# Altium PCB 64_Electrodes.PcbDoc
Units mil, origin at the board's own origin, x right, y up, seen from the top; angles counter-clockwise.
Board outline 2035.03 x 1255.03 mil, 2 copper layers (Top Layer, Bottom Layer); 4 components, 0 nets, 140 pads, 32 vias.
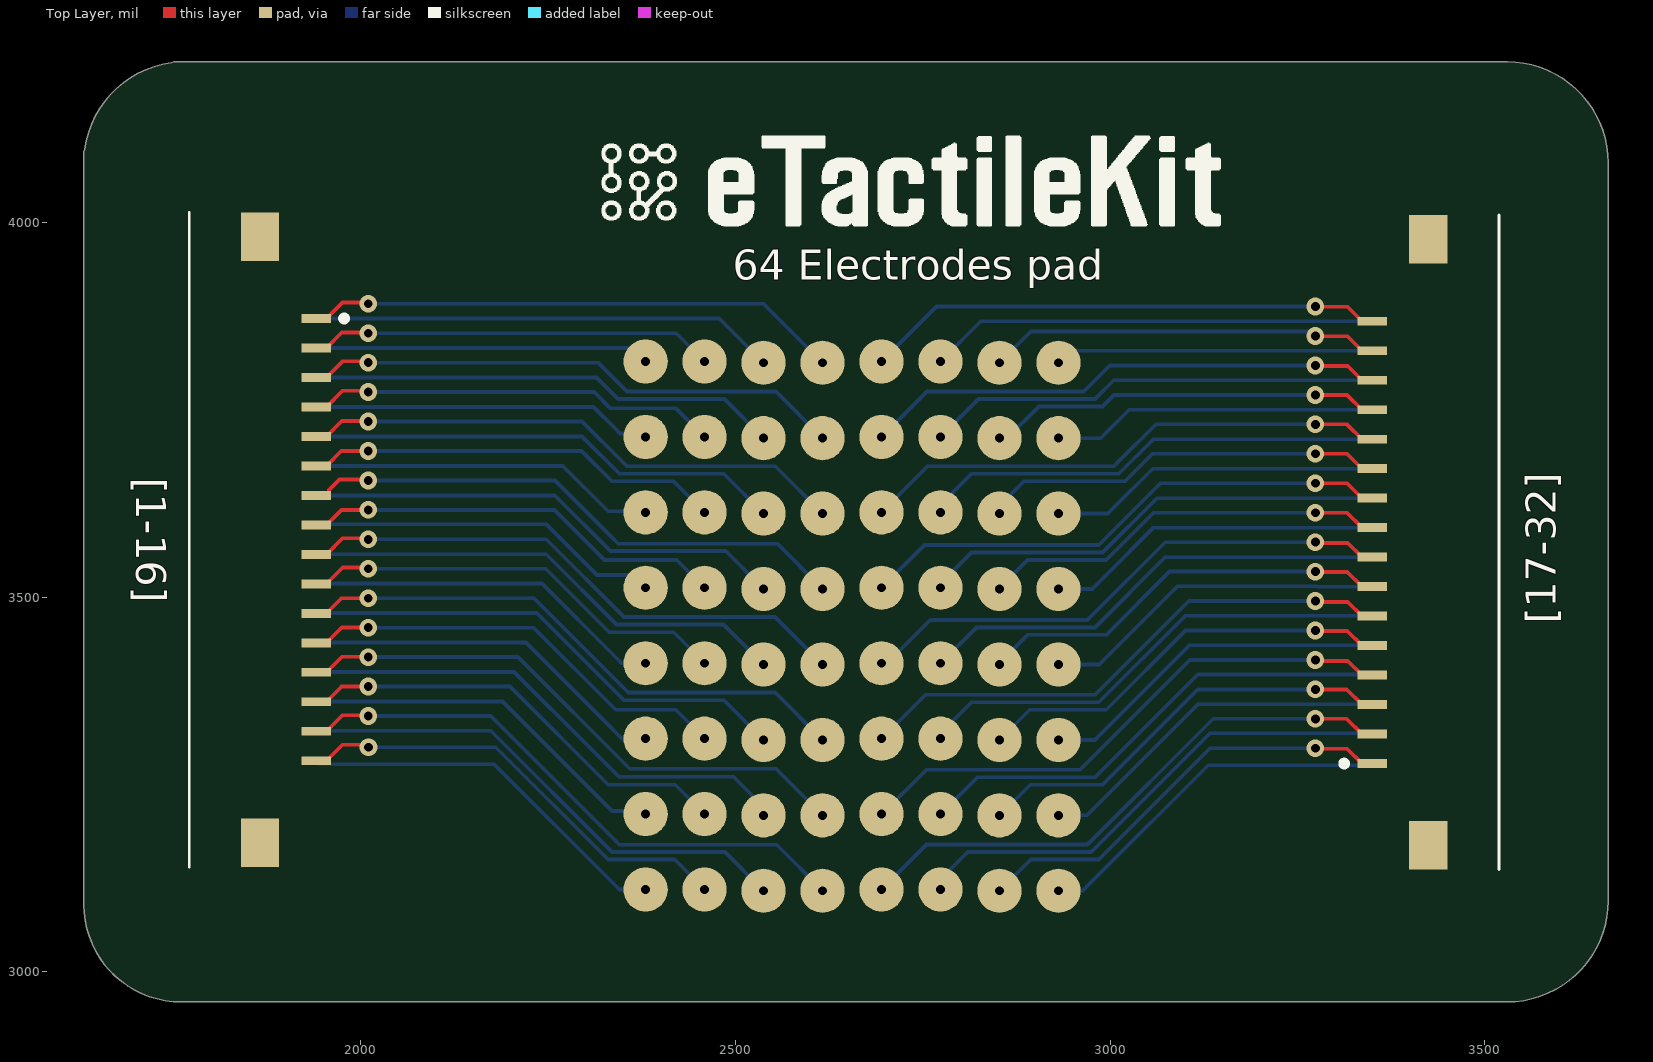
[diagram p0: Top Layer view]
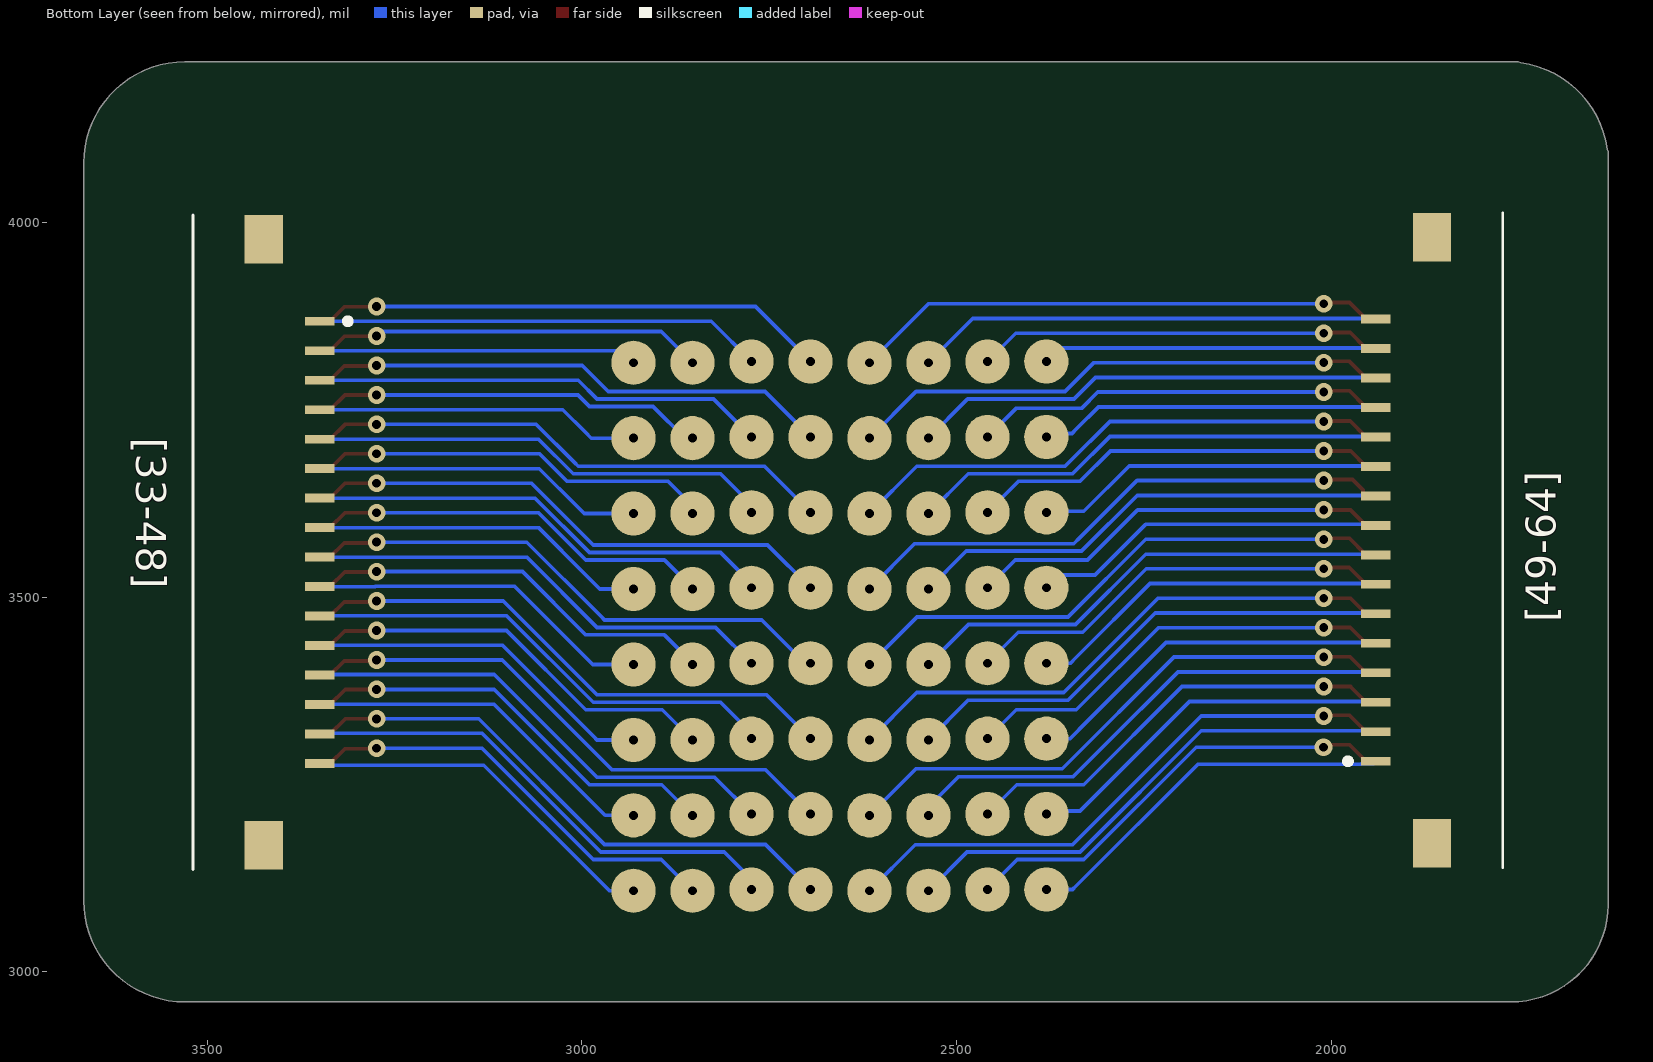
[diagram p1: Bottom Layer view, seen from below]

## Layer stack, top to bottom
Top Solder: solder mask 0.4, Solder Resist, Dk 3.5
Top Layer: signal copper 1.4
Dielectric 1: dielectric 12.6, FR-4, Dk 4.8
Bottom Layer: signal copper 1.4
Bottom Solder: solder mask 0.4, Solder Resist, Dk 3.5

## Board outline
1629.98,3090 1629.98,4095 1631.23,4098.31 cw(c1765,4080) 1746.69,4213.77 1750,4215.02 3530,4215.02 cw(c3530,4080) 3665.01,4080 3665.01,3095 cw(c3530,3095) 3530,2959.99 1760,2959.99 cw(c1760,3090)

## Design rules (kind name [scope] priority, off if disabled: settings)
BoardOutlineClearance [All] p1: gap=7.87 ignorepadtopadclearanceinfootprint=FALSE
Clearance [All] p1: gap=5 ignorepadtopadclearanceinfootprint=FALSE except(9.84: Arc-Hole Track-Hole SMDPad-Hole THPad-Hole Via-Hole Fill-Hole Poly-Hole Region-Hole Text-Hole)
ComponentClearance [All] p1: gap=5 collisioncheckmode=3 verticalgap=5 showdistances=TRUE
DiffPairsRouting [All] p1: maxlimit=10 minlimit=5 mostfreqgap=5 toplayer_minwidth=5 toplayer_maxwidth=1000 toplayer_prefwidth=5 bottomlayer_minwidth=5 bottomlayer_maxwidth=1000 bottomlayer_prefwidth=5 maxuncoupledlength=500
Height [All] p1: minheight=0 maxheight=71497.94 prefheight=500
HoleSize [All] p1: absolutevalues=TRUE maxlimit=248.03 minlimit=11.81 maxpercent=80.000 minpercent=20.000
HoleToHoleClearance [All] p1: gap=9.84 allowstackedmicrovias=FALSE
MinimumAnnularRing [All] p1: minimumring=3
MinimumSolderMaskSliver [All] p1: minsoldermaskwidth=0
PlaneClearance [All] p1: clearance=5
PlaneConnect PlaneConnectPowerPads [InPadClass('PowerPads')] p1: planeconnectstyle=Direct reliefexpansion=20 reliefentries=4 reliefconductorwidth=10 reliefairgap=10
PlaneConnect [All] p2: pad.planeconnectstyle=Relief pad.reliefexpansion=11.81 pad.reliefentries=4 pad.reliefconductorwidth=5 pad.reliefairgap=5 via.planeconnectstyle=Direct via.reliefexpansion=11.81 via.reliefentries=4 via.reliefconductorwidth=5 via.reliefairgap=5
PolygonConnect PolygonConnectPowerPads [All vs (InPadClass('PowerPads'))] p1: connectstyle=Direct reliefconductorwidth=10 reliefentries=4 polygonreliefangle="90 Angle" airgapwidth=10
PolygonConnect [All] p2: thpad.connectstyle=Relief thpad.reliefconductorwidth=5 thpad.reliefentries=4 thpad.polygonreliefangle="90 Angle" thpad.airgapwidth=5 smdpad.connectstyle=Relief smdpad.reliefconductorwidth=5 smdpad.reliefentries=4 smdpad.polygonreliefangle="90 Angle" smdpad.airgapwidth=5 via.connectstyle=Direct via.reliefconductorwidth=5 via.reliefentries=4 via.polygonreliefangle="90 Angle" via.airgapwidth=5
RoutingVias [All] p1: holewidth=11.81 width=23.62 viastyle="Through Hole" minholewidth=11.81 minwidth=23.62 maxholewidth=23.62 maxwidth=259.84
SilkToSilkClearance [All] p1: silktosilkclearance=0
SilkToSolderMaskClearance [IsPad] p1: minsilkscreentomaskgap=5 clearancetoexposedcopper=TRUE
SolderMaskExpansion [All] p1: expansion=2.95 istentingtop=FALSE
Width [All] p1: maxlimit=1000 minlimit=5 preferedwidth=5 minimp=50.000000 maximp=50.000000 favimp=50.000000
20 further rules are at their usual default settings.

## Classes and differential pairs
component class Sheet10: [17-32] [33-48] [49-64]

## Components (designator, comment, footprint, x,y, rotation, side; value= is the part's Value field where it differs from the comment)
[1-16] "686116183422" 686116183422 1855.35,3577.17 r270 top (schematic designator P2)
[17-32] "686116183422" 686116183422 3434.65,3573.46 r90 top (schematic designator P4)
[33-48] "686116183422" 686116183422 3434.65,3573.46 r270 bottom (schematic designator P1)
[49-64] "686116183422" 686116183422 1855.35,3576.54 r90 bottom (schematic designator P3)

## Footprints (in the part's own frame and the unit in brackets; to place one, negate y for a bottom-side part, rotate by r counter-clockwise, add the part's x,y. Pads: shape width x height; smd on the part's side, far side on the other; paste and mask are expansions set on the pad)
686116183422 [mm]
  rect 0.3x1 smd: 1(-7.5,2.15) 2(-6.5,2.15) 3(-5.5,2.15) 4(-4.5,2.15) 5(-3.5,2.15) 6(-2.5,2.15) 7(-1.5,2.15) 8(-0.5,2.15) 9(0.5,2.15) 10(1.5,2.15) 11(2.5,2.15) 12(3.5,2.15) 13(4.5,2.15) 14(5.5,2.15) 15(6.5,2.15) 16(7.5,2.15)
  rect 1.65x1.3 smd: MP1(10.275,0.25) MP2(-10.275,0.25)
  silkscreen extent -11.1,-2.15 11.1,3.2, body extent -11.1,-2.15 11.1,2.62, height 1.4

## Part data
[1-16] [17-32] [33-48] [49-64]: "Wurth Elektronik WR-FPC Series 1mm Pitch 16 Way Horizontal SMT Female FPC Connector, Top Contact", Manufacturer_Name="Wurth Elektronik", Mouser Part Number=710-686116183422, Datasheet Link=https://componentsearchengine.com/Datasheets/1/686116183422.pdf, Geometry.Height=1.3mm, Manufacturer_Part_Number=686116183422, Mouser Price/Stock=https://www.mouser.co.uk/ProductDetail/Wurth-Elektronik/686116183422?qs=5aG0NVq1C4zMCTkNAYvBmg%3D%3D

## Free pads (board coordinates)
  round 59.06 hole 11.81: 308(2380,3815) 308(2537.48,3813.35) 308(2695,3815) 308(2852.48,3813.35) 309(2380,3110) 309(2537.48,3108.35) 309(2695,3110) 309(2852.48,3108.35) 310(2380,3714.29) 310(2537.48,3712.63) 310(2695,3714.29) 310(2852.48,3712.63) 311(2380,3512.86) 311(2537.48,3511.2) 311(2695,3512.86) 311(2852.48,3511.2) 312(2380,3311.43) 312(2537.48,3309.77) 312(2695,3311.43) 312(2852.48,3309.77) 313(2380,3210.71) 313(2537.48,3209.06) 313(2695,3210.71) 313(2852.48,3209.06) 314(2380,3613.57) 314(2537.48,3611.92) 314(2695,3613.57) 314(2852.48,3611.92) 315(2380,3412.14) 315(2537.48,3410.49) 315(2695,3412.14) 315(2852.48,3410.49) 316(2458.74,3815) 316(2616.22,3813.35) 316(2773.74,3815) 316(2931.22,3813.35) 317(2458.74,3512.86) 317(2458.74,3613.57) 317(2616.22,3511.2) 317(2616.22,3611.92) 317(2773.74,3512.86) 317(2773.74,3613.57) 317(2931.22,3511.2) 317(2931.22,3611.92) 318(2458.74,3311.43) 318(2616.22,3309.77) 318(2773.74,3311.43) 318(2931.22,3309.77) 319(2458.74,3210.71) 319(2616.22,3209.06) 319(2773.74,3210.71) 319(2931.22,3209.06) 320(2458.74,3110) 320(2616.22,3108.35) 320(2773.74,3110) 320(2931.22,3108.35) 321(2458.74,3714.29) 321(2616.22,3712.63) 321(2773.74,3714.29) 321(2931.22,3712.63) 322(2458.74,3412.14) 322(2616.22,3410.49) 322(2773.74,3412.14) 322(2931.22,3410.49) 323(2458.74,3311.43) 323(2616.22,3309.77) 323(2773.74,3311.43) 323(2931.22,3309.77)

## Via types
v1: diameter 23.62, hole 11.81, Top Layer to Bottom Layer, 32 vias

## Nets (pads, with @x,y where several pads share a name; then routed paths per layer and width w, separated by ;. In a path a pad name is that pad's centre, name@x,y a point inside that pad or via, vN(x,y) a via of type N, cw(c..) or ccw(c..) an arc to the next point about the centre after c; other vN are vias at no path point)
pads on no net: [1-16].1 [1-16].2 [1-16].3 [1-16].4 [1-16].5 [1-16].6 [1-16].7 [1-16].8 [1-16].9 [1-16].10 [1-16].11 [1-16].12 [1-16].13 [1-16].14 [1-16].15 [1-16].16 [1-16].MP1 [1-16].MP2 [17-32].1 [17-32].2 [17-32].3 [17-32].4 [17-32].5 [17-32].6 [17-32].7 [17-32].8 [17-32].9 [17-32].10 [17-32].11 [17-32].12 [17-32].13 [17-32].14 [17-32].15 [17-32].16 [17-32].MP1 [17-32].MP2 [33-48].1 [33-48].2 [33-48].3 [33-48].4 [33-48].5 [33-48].6 [33-48].7 [33-48].8 [33-48].9 [33-48].10 [33-48].11 [33-48].12 [33-48].13 [33-48].14 [33-48].15 [33-48].16 [33-48].MP1 [33-48].MP2 [49-64].1 [49-64].2 [49-64].3 [49-64].4 [49-64].5 [49-64].6 [49-64].7 [49-64].8 [49-64].9 [49-64].10 [49-64].11 [49-64].12 [49-64].13 [49-64].14 [49-64].15 [49-64].16 [49-64].MP1 [49-64].MP2
copper on no net: | length 38667.3
  Top Layer w5: 1940,3281.89 1953.78,3281.89 1975.23,3303.34 1988.19,3303.34 2006.66,3303.34 v1(2010,3300) ; 1940,3321.26 1953.78,3321.26 1975.23,3342.71 2008.67,3342.71 v1(2009.71,3341.67) ; 1940,3400 1953.78,3400 1974.65,3420.87 1980.87,3420.87 v1@2009.14,3420.87 ; 1940,3439.37 1953.78,3439.37 1974.41,3460 1980,3460 2009.32,3460 v1(2009.71,3459.61) v1@2008.5,3460.82 ; 1940,3478.74 1953.78,3478.74 1957.19,3482.15 ; 1940,3518.11 1953.78,3518.11 1975.67,3540 1985,3540 2007.95,3540 2008.39,3539.56 v1(2009.71,3538.24) ; 1940,3557.48 1953.78,3557.48 1975.23,3578.93 2008.33,3578.93 v1(2009.71,3577.55) ; 1940,3596.85 1953.78,3596.85 1973.79,3616.86 v1(2009.71,3616.86) v1@2008.28,3618.3 ; 1940,3636.22 1953.78,3636.22 1957.19,3639.63 1957.19,3643.32 1971.26,3657.4 2008.49,3657.4 v1(2009.71,3656.18) ; 1940,3675.59 1953.78,3675.59 1973.68,3695.49 v1(2009.71,3695.49) ; 1940,3714.96 1953.78,3714.96 1974.42,3735.61 v1@2008.91,3735.61 ; 1940,3754.33 1953.78,3754.33 1975.23,3775.78 2008.05,3775.78 v1(2009.71,3774.12) ; 1940,3793.7 1953.78,3793.7 1975.23,3815.15 2008,3815.15 v1(2009.71,3813.43) ; 1940,3833.07 1953.78,3833.07 1974.34,3853.63 1983.63,3853.63 v1@2008.83,3853.63 ; 1940,3872.44 1953.78,3872.44 1975.23,3893.89 2007.88,3893.89 v1(2009.71,3892.06) ; 1941.1,3359.53 1940,3360.63 1953.78,3360.63 1973.15,3380 1974.13,3380.98 v1(2009.71,3380.98) ; 1957.19,3482.19 1973.92,3498.92 v1(2009.71,3498.92) ; v1@2007.94,3854.52 v1(2009.71,3852.75) ; v1@2008.11,3736.41 v1(2009.71,3734.8) ; v1@2008.56,3421.45 v1(2009.71,3420.29) ; v1(3274.15,3298.58) v1@3275.57,3297.16 ; v1(3274.15,3416.52) 3275.4,3415.27 3317.25,3415.27 3336.22,3396.3 3350,3396.3 ; v1(3274.15,3455.83) v1@3275.35,3454.64 ; v1(3274.15,3495.15) 3275.29,3494.01 3317.25,3494.01 3336.22,3475.04 3350,3475.04 ; v1(3274.15,3534.46) v1@3275.23,3533.38 ; v1(3274.15,3573.78) 3275.18,3572.75 3317.25,3572.75 3336.22,3553.78 3350,3553.78 ; v1(3274.15,3809.66) 3274.84,3808.97 3317.25,3808.97 3336.22,3790 3350,3790 ; v1(3274.15,3848.97) v1@3274.78,3848.34 ; v1(3274.15,3888.29) v1@3274.73,3887.71 ; v1@3274.47,3848.66 3316.93,3848.66 3336.22,3829.37 3350,3829.37 ; v1@3274.44,3888 3316.96,3888 3336.22,3868.74 3350,3868.74 ; v1@3274.69,3533.92 3316.71,3533.92 3336.22,3514.41 3350,3514.41 ; v1@3274.75,3455.24 3316.65,3455.24 3336.22,3435.67 3350,3435.67 ; v1@3274.86,3297.87 3316.54,3297.87 3336.22,3278.19 3350,3278.19 ; v1@3274.9,3769.6 v1(3274.15,3770.34) 3316.51,3770.34 3336.22,3750.63 3350,3750.63 ; v1@3274.95,3730.23 v1(3274.15,3731.03) 3316.45,3731.03 3336.22,3711.26 3350,3711.26 ; v1@3275.01,3690.86 v1(3274.15,3691.72) 3316.39,3691.72 3336.22,3671.89 3350,3671.89 ; v1@3275.07,3651.49 v1(3274.15,3652.4) 3316.34,3652.4 3336.22,3632.52 3350,3632.52 ; v1@3275.12,3612.12 v1(3274.15,3613.09) 3316.28,3613.09 3336.22,3593.15 3350,3593.15 ; v1@3275.46,3375.9 v1(3274.15,3377.21) 3315.94,3377.21 3336.22,3356.93 3350,3356.93 ; v1@3275.52,3336.53 v1(3274.15,3337.89) 3315.89,3337.89 3336.22,3317.56 3350,3317.56
  Bottom Layer w5: 1940,3281.26 1943.41,3277.85 1959.61,3277.85 1960.11,3277.35 2004.26,3277.35 2177.65,3277.35 2340,3115 2345,3110 2380,3110 ; 1940,3320.63 1941.26,3321.89 2008.38,3321.89 2173.11,3321.89 2335,3160 2485.83,3160 2537.48,3108.35 ; 1940,3360 1941.06,3361.06 2013.75,3361.06 2188.94,3361.06 2335,3215 2375.71,3215 2380,3210.71 ; 1940,3399.37 1941.2,3400.57 2010.9,3400.57 2204.43,3400.57 2305,3300 2344.32,3260.68 2497.23,3260.68 2537.48,3220.43 2537.48,3209.06 ; 1940,3438.74 1940.93,3439.67 2001.5,3439.67 2220.33,3439.67 2325,3335 2348.57,3311.43 2380,3311.43 ; 1940,3478.11 1941.12,3479.23 2007.44,3479.23 2234.62,3479.23 2351.13,3362.72 2484.53,3362.72 2537.48,3309.77 ; 1940,3517.48 1940.95,3518.43 2007.95,3518.43 2241.57,3518.43 2340,3420 2347.86,3412.14 2380,3412.14 ; 1940,3556.85 1940.88,3557.73 2007.5,3557.73 2247.27,3557.73 2341.1,3463.9 2484.07,3463.9 2537.48,3410.49 ; 1940,3596.22 1941.32,3597.54 2247.46,3597.54 2315,3530 2362.86,3530 2380,3512.86 ; 1940,3636.22 2007.39,3636.22 2258.78,3636.22 2333.19,3561.81 2486.88,3561.81 2537.48,3511.2 ; 1940,3675.59 2007.34,3675.59 2269.41,3675.59 2330,3615 2378.57,3615 2380,3613.57 ; 1940,3714.96 2007.28,3714.96 2295.04,3714.96 2345,3665 2484.4,3665 2537.48,3611.92 ; 1940,3754.33 2007.22,3754.33 2310.54,3754.33 2340.47,3724.4 2345.9,3718.97 2375.31,3718.97 2380,3714.29 ; 1940,3793.7 2007.17,3793.7 2314.42,3793.7 2343.13,3765 2485.11,3765 2537.48,3712.63 ; 1940,3833.07 2007.11,3833.07 2361.93,3833.07 2380,3815 ; 1940,3872.44 2007.05,3872.44 2478.39,3872.44 2537.48,3813.35 ; v1(2009.71,3341.67) 2173.33,3341.67 2345.09,3169.91 2555.09,3169.91 2616.22,3108.78 2616.22,3108.35 ; v1(2009.71,3380.98) 2199.02,3380.98 2330,3250 2419.45,3250 2458.74,3210.71 ; v1(2009.71,3420.29) 2209.71,3420.29 2358.7,3271.3 2553.98,3271.3 2616.22,3209.06 ; v1(2009.71,3459.61) 2230.39,3459.61 2340,3350 2420.17,3350 2458.74,3311.43 ; v1(2009.71,3498.92) 2231.08,3498.92 2356.92,3373.08 2552.92,3373.08 2616.22,3309.77 ; v1(2009.71,3538.24) 2246.76,3538.24 2331.56,3453.44 2417.44,3453.44 2458.74,3412.14 ; v1(2009.71,3577.55) 2247.45,3577.55 2351.06,3473.94 2552.77,3473.94 2616.22,3410.49 ; v1(2009.71,3616.86) 2258.14,3616.86 2325,3550 2410,3550 2421.6,3550 2458.74,3512.86 ; v1(2009.71,3656.18) 2258.82,3656.18 2335,3580 2343.48,3571.52 2555.91,3571.52 2616.22,3511.2 ; v1(2009.71,3695.49) 2294.51,3695.49 2335,3655 2417.31,3655 2458.74,3613.57 ; v1(2009.71,3734.8) 2295.2,3734.8 2350,3680 2355,3675 2530,3675 2553.14,3675 2616.22,3611.92 ; v1(2009.71,3774.12) 2311.43,3774.12 2333.16,3752.39 2420.63,3752.39 2458.74,3714.29 ; v1(2009.71,3813.43) 2316.57,3813.43 2355,3775 2553.85,3775 2616.22,3712.63 ; v1(2009.71,3852.75) 2420.99,3852.75 2458.74,3815 ; v1(2009.71,3892.06) 2537.51,3892.06 2616.22,3813.35 ; v1(2010,3300) 2180,3300 2330,3150 2418.74,3150 2458.74,3110 ; 2695,3110 2755,3170 2970,3170 3137.89,3337.89 v1(3274.15,3337.89) ; 2695,3210.71 2695.71,3210.71 2755,3270 2960,3270 2965,3275 3106.52,3416.52 v1(3274.15,3416.52) ; 2695,3311.43 2753.57,3370 2755,3370 2980,3370 2985,3375 3105.15,3495.15 v1(3274.15,3495.15) ; 2695,3412.14 2702.14,3412.14 2760,3470 2970,3470 2975,3475 3073.78,3573.78 v1(3274.15,3573.78) ; 2695,3512.86 2752.14,3570 2770,3570 2985,3570 2995,3580 3067.4,3652.4 v1(3274.15,3652.4) ; 2695,3613.57 2756.43,3675 2765,3675 3005,3675 3010,3680 3061.03,3731.03 v1(3274.15,3731.03) ; 2695,3714.29 2755.71,3775 2965,3775 2970,3780 2999.66,3809.66 v1(3274.15,3809.66) ; 2695,3815 2768.29,3888.29 v1(3274.15,3888.29) ; 2773.74,3110 2773.74,3123.74 2810,3160 2975,3160 3133.55,3318.55 3276.01,3318.55 3349,3318.55 3350,3317.56 ; 2773.74,3210.71 2823.03,3260 2965,3260 2980,3260 3110,3390 3117.14,3397.14 3275.5,3397.14 3349.16,3397.14 3350,3396.3 ; 2773.74,3311.43 2773.74,3318.74 2815,3360 2985,3360 3100.36,3475.36 3275.6,3475.36 3349.68,3475.36 ; 2773.74,3412.14 2821.6,3460 2980,3460 3073.78,3553.78 3276.02,3553.78 3350,3553.78 ; 2773.74,3512.86 2773.74,3518.74 2815,3560 2990,3560 3062.52,3632.52 3275.91,3632.52 3350,3632.52 ; 2773.74,3613.57 2773.74,3623.74 2815,3665 3011.7,3665 3057.96,3711.26 3275.8,3711.26 3350,3711.26 ; 2773.74,3714.29 2824.45,3765 2980,3765 3005,3790 3275.69,3790 3350,3790 ; 2773.74,3815 2827.48,3868.74 3275.57,3868.74 3350,3868.74 ; 2852.48,3108.35 2894.13,3150 2985,3150 3133.58,3298.58 v1(3274.15,3298.58) ; 2852.48,3209.06 2893.42,3250 2895,3250 2990,3250 3117.21,3377.21 v1(3274.15,3377.21) ; 2852.48,3309.77 2892.71,3350 2990,3350 2995,3350 3100,3455 3100.83,3455.83 v1(3274.15,3455.83) ; 2852.48,3410.49 2852.48,3412.48 2890,3450 2995,3450 3079.46,3534.46 v1(3274.15,3534.46) ; 2852.48,3511.2 2852.48,3512.48 2890,3550 2995,3550 3058.09,3613.09 v1(3274.15,3613.09) ; 2852.48,3611.92 2852.48,3622.48 2885,3655 3020,3655 3056.72,3691.72 v1(3274.15,3691.72) ; 2852.48,3712.63 2862.63,3712.63 2905,3755 2990,3755 3005.34,3770.34 v1(3274.15,3770.34) ; 2852.48,3813.35 2894.13,3855 3265,3855 3268.13,3855 v1(3274.15,3848.97) ; 2931.22,3108.35 2963.35,3108.35 2980,3125 3131,3276 3281.9,3276 3347.81,3276 3350,3278.19 ; 2931.22,3209.06 2969.06,3209.06 2975,3215 3117.35,3357.35 3275.17,3357.35 3349.58,3357.35 3350,3356.93 ; 2931.22,3309.77 2979.77,3309.77 2985,3315 3106.02,3436.02 3278.03,3436.02 3349.65,3436.02 ; 2931.22,3410.49 2985.49,3410.49 3090,3515 3275.49,3515 3276.08,3514.41 3350,3514.41 ; 2931.22,3511.2 2976.2,3511.2 2995,3530 3058.15,3593.15 3275.97,3593.15 3350,3593.15 ; 2931.22,3611.92 2996.92,3611.92 3005,3620 3056.89,3671.89 3275.86,3671.89 3350,3671.89 ; 2931.22,3712.63 2987.63,3712.63 2995,3720 3025.63,3750.63 3275.74,3750.63 3350,3750.63 ; 2931.22,3813.35 2947.24,3829.37 3275.63,3829.37 3350,3829.37

## Silkscreen, mask and mechanical layers (free items; w line width, h text height)
Top Overlay:
  drawing of 18 lines, arcs and shapes, not listed
  text "64 Electrodes pad" at 2496,3924.33 h40
Mechanical 1:
  lines w10: 1635,4080 cw(c1765,4080) 1765,4210 ; 1635,4095 1635,3090 ccw(c1760,3090) 1760,2965 3530,2965 ccw(c3530,3095) 3660,3095 3660,4080 ccw(c3530,4080) 3530,4210 2005,4210 1750,4210